# Altium PCB balan_31.PcbDoc (part 2 of 2)
Units mm, origin at the board's own origin, x right, y up, seen from the top; angles counter-clockwise.
Board outline 80 x 100 mm, 2 copper layers (Top Layer, Bottom Layer), stack 1.57 mm thick; 167 components, 120 nets, 563 pads, 148 vias.
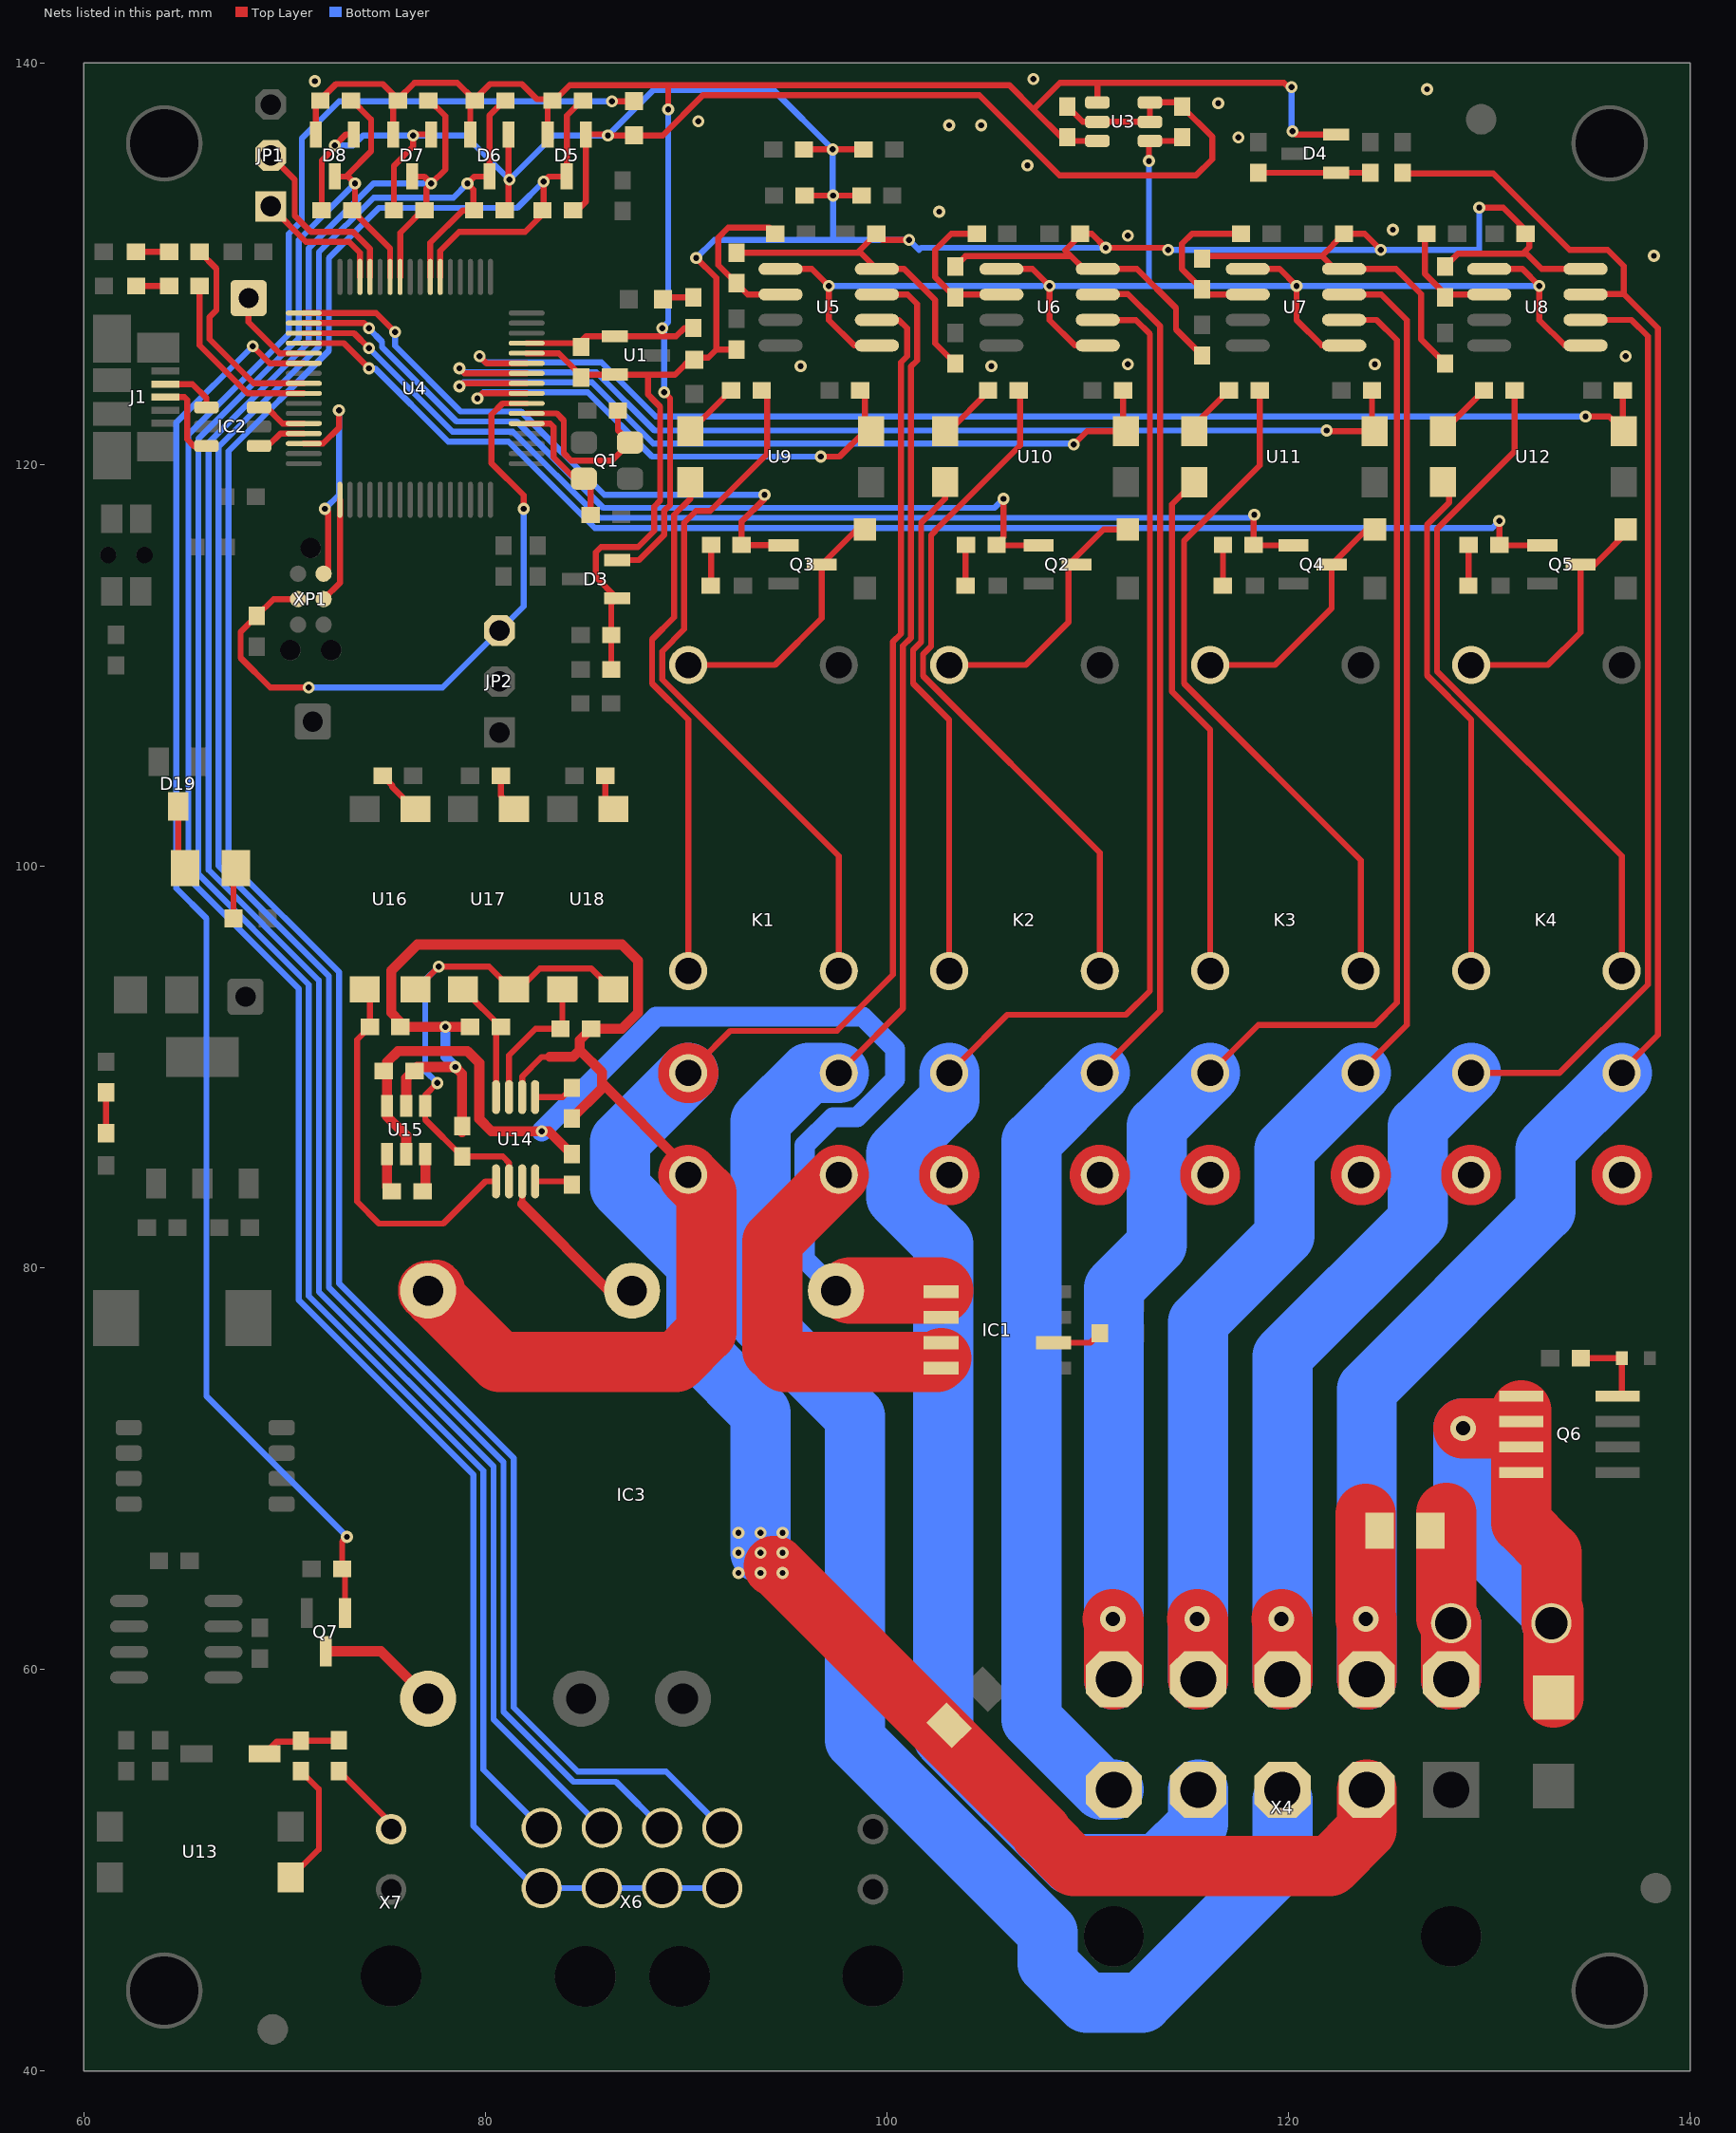
[diagram p2: the nets of this part, all layers, seen from the top]

## Via types
v1: diameter 0.6, hole 0.3, Top Layer to Bottom Layer, 143 vias
v2: diameter 1.27, hole 0.711, Top Layer to Bottom Layer, 5 vias

## Nets (pads, with @x,y where several pads share a name; then routed paths per layer and width w, separated by ;. In a path a pad name is that pad's centre, name@x,y a point inside that pad or via, vN(x,y) a via of type N, cw(c..) or ccw(c..) an arc to the next point about the centre after c; other vN are vias at no path point) (continued)
GNDA: C1.1 C3.1 C13.1 C15.1 C16.1 C17.1 C18.1 C19.1 C20.1 C21.1 C22.1 C23.1 C24.1 C25.1 C26.1 C27.1 C28.1 C29.1 C30.1 C31.1 C32.1 D3.1 D4.1 D5.1 D6.1 D7.1 D8.1 L2.1 L3.1 R10.1 R12.1 R14.1 R16.1 R18.1 R20.1 U1.2 U3.2 U3.3 U3.5 U4.12 U5.4 U6.4 U7.4 U8.4 | length 249.8
  Top Layer w0.3: C32.1@71.835,132.663 71.847,132.675 71.847,135.145 72.5,135.798 v1(72.5,135.9) 73.05,136.45 D8.1@73.447,136.45 ; C31.1@75.438,132.663 75.438,134.886 76.4,135.848 v1(76.4,136.4) 76.45,136.45 D7.1@77.297,136.45 ; C30.1@80.959,132.663 81.147,132.851 D6.1@81.147,136.45 ; U4.12@82.05,125.55 83.65,125.55 84.763,124.437 84.813,124.487 U1.2@86.45,124.487 88,124.487 ; C29.1@84.562,132.663 84.997,133.098 D5.1@84.997,136.45 86.05,136.45 v1(86.1,136.4) L3.1@87.4,136.4 88.829,136.4 90.829,138.4 104.6,138.4 108.6,134.4 115.393,134.4 116.2,135.207 116.2,136.337 C3.1@114.7,137.837 114.497,138.04 U3.3@113.1,138.04 U3.2@113.1,137.075 U3.5@110.479,137.075 109.745,137.075 C13.1@108.983,137.837 C13.1@108.983,137.864 ; R10.1@86.262,109.8 C19.1@86.262,111.513 86.262,113.062 D3.1@86.55,113.35 85.5,114.4 85.5,115.645 85.755,115.9 87.593,115.9 88.4,116.707 88.4,117.914 88.7,118.214 88.7,122.881 88.25,123.331 88.25,123.35 88.1,123.5 88.1,124.387 88,124.487 ; L2.1@90.4,125.45 89.437,124.487 88,124.487 ; v1(90.5,130.3) 91.5,129.3 91.5,125.738 ; L2.1@90.512,125.338 91.1,125.338 91.5,125.738 ; C15.1@92.5,125.738 91.5,125.738 ; C25.1@92.5,130.562 98.524,130.562 ; C23.1@95.862,135.7 v1(97.3,135.7) C24.1@98.838,135.7 ; C21.1@95.9,133.4 v1(97.319,133.4) C22.1@98.738,133.4 ; v1(101.1,131.2) 99.762,131.2 R14.1@99.462,131.5 98.524,130.562 ; C16.1@103.4,125.038 102.4,126.038 102.4,128.2 100.854,129.746 U5.4@99.5,129.746 98.684,130.562 98.524,130.562 ; C26.1@103.4,129.862 103.9,130.362 103.9,130.396 109.158,130.396 ; v1(114,130.7) 113.9,130.8 v1(110.9,130.8) 110.2,131.5 109.7,131.5 109.662,131.462 108.877,130.677 109.158,130.396 ; C17.1@115.7,125.438 114.4,126.738 114.4,127.8 112.454,129.746 U6.4@110.5,129.746 109.808,129.746 109.158,130.396 ; C27.1@115.7,130.262 115.7,130.396 121.658,130.396 ; C20.1@118.501,134.537 D4.1@122.387,134.537 R12.1@124.073,134.537 ; v1(124.6,130.7) 123.8,131.5 R18.1@122.762,131.5 121.658,130.396 ; C18.1@127.8,125.038 126.6,126.238 126.6,128.5 125.354,129.746 U7.4@122.775,129.746 122.308,129.746 121.658,130.396 ; C28.1@127.8,129.862 128.438,130.5 131.662,130.5 ; v1(129.5,132.8) 130.7,132.8 132,131.5 132,130.838 131.662,130.5 ; U8.4@134.8,129.746 132.616,129.746 131.862,130.5 131.662,130.5
  Bottom Layer w0.3: v1(72.5,135.9) 73.4,135.9 73.9,136.4 v1(76.4,136.4) 79,136.4 v1(81.2,134.2) 83.4,136.4 v1(86.1,136.4) 88.35,138.65 94.35,138.65 v1(97.3,135.7) 97.3,133.419 v1(97.319,133.4) ; v1(90.5,130.3) 91.4,131.2 97.3,131.2 ; v1@97.319,133.2 97.319,131.219 97.3,131.2 ; v1(110.9,130.8) 101.7,130.8 101.6,130.7 v1(101.1,131.2) 97.3,131.2 ; v1(114,130.7) v1(124.6,130.7) 129.5,130.7 v1(129.5,132.8)
  other v1: 95.7,124.9 105.2,124.9 112,125 124.3,125 136.8,125.4 138.2,130.4 112,131.4 125.2,131.7 102.6,132.6 107,134.9 117.5,136.3 103.1,136.9 104.7,136.9 90.6,137.1 116.5,138 126.9,138.7 71.5,139.1 107.3,139.2
GNDL: K1.21 R8.2 U5.2 X4.2 | length 116.1
  Top Layer w0.3: K1.21@90.6,89.7 90.6,90.2 92.2,91.8 97.5,91.8 100.3,94.6 100.3,111.18 100.7,111.58 100.7,125.1 101,125.4 101,126.8 100.594,127.206 U5.2@99.5,127.206
  Top Layer w2: K1.21@90.6,89.7 ccw(c90.1,89.7) K1.21@90.6,89.7
  Top Layer w3: 94.35,65.15 94.45,65.15 v1(94.8,64.8) 107.7,51.9 107.7,51.796 109.296,50.2 122.075,50.2 123.9,52.025 X4.2@123.9,54
  Bottom Layer w3: K1.21@90.1,89.7 86.7,86.3 86.7,84 90.5,80.2 90.5,75.975 93.7,72.775 v1(93.7,66.8) v1(93.7,65.8) ; v1@93.75,65.85 v1@93.8,65.8
  other v1: 92.6,64.8 93.7,64.8 92.6,65.8 94.8,65.8 92.6,66.8 94.8,66.8
GNDT: L3.2 X6.1 X6.2 X6.3 X6.4 | length 123.3
  Top Layer w0.3: v1(86.3,138.1) L3.2@87.4,138.1
  Bottom Layer w0.3: v1(86.3,138.1) 72.7,138.1 70.85,136.25 70.85,132.15 70.2,131.5 70.2,126.5 65.2,121.5 65.2,99.4 70.7,93.9 70.7,78.393 79.4,69.693 79.4,52.2 82.5,49.1 X6.4@82.8,49.1 X6.3@85.8,49.1 X6.2@88.8,49.1 X6.1@91.8,49.1
IN_ADC0: C25.2 R13.2 U5.6 | length 8.2
  Top Layer w0.3: R13.2@94.438,131.5 94.138,131.8 92.1,131.8 91.6,131.3 91.6,129.938 C25.2@92.5,129.038 93.062,128.476 U5.6@94.7,128.476
IN_ADC1: C26.2 R15.2 U6.6 | length 7.3
  Top Layer w0.3: C26.2@103.4,128.338 102.4,129.338 102.4,130.7 103.2,131.5 R15.2@104.476,131.5 ; C26.2@103.562,128.476 U6.6@105.7,128.476
IN_ADC2: C27.2 R17.2 U7.6 | length 8.2
  Top Layer w0.3: R17.2@117.638,131.5 115.2,131.5 114.7,131 114.7,129.738 C27.2@115.7,128.738 115.962,128.476 U7.6@117.975,128.476
IN_ADC3: C28.2 R19.2 U8.6 | length 5.7
  Top Layer w0.3: R19.2@127.076,131.5 126.8,131.224 126.8,129.503 127.827,128.476 U8.6@130,128.476
IN_BALANCER: R31.2 X7.2 | length 4
  Top Layer w0.3: R31.2@72.7,54.938 75.3,52.338 X7.2@75.3,52.038
IP+: C36.2 IC1.1 IC1.2 IC3.4 R43.1 U15.3 U15.5 | length 58.8
  Top Layer w0.5: U15.5@76.051,85.662 76.051,86.575 75.101,87.525 U15.3@75.101,88.062 75.101,90.253 75.649,90.8 79.1,90.8 79.695,90.205 79.695,87.405 80.3,86.8 83.162,86.8 R43.1@84.3,85.662 R43.1@84.462,85.662
  Top Layer w3: IC1.1@102.645,78.86 IC1.1@102.7,78.805
  Top Layer w3.3: IC3.4@98.16,78.86 IC1.1@102.645,78.86
  Bottom Layer w1: v1(82.8,86.8) 88.5,92.5 98.8,92.5 100.4,90.9 100.4,89.389 98.511,87.5 97.3,87.5 95.9,86.1 95.9,80.42 IC3.4@97.46,78.86
LED1: R3.1 U4.40 | length 10.5
  Top Layer w0.3: R3.1@65.762,130.6 66.6,129.762 66.6,127.7 66.25,127.35 66.25,126.25 68.45,124.05 U4.40@70.95,124.05
LED2: R4.1 U4.41 | length 9.1
  Top Layer w0.3: R4.1@65.762,128.9 65.75,128.888 65.75,125.95 68.15,123.55 U4.41@70.95,123.55
MCS: R51.1 U14.3 U18.3 | length 7.2
  Top Layer w0.3: U14.3@81.175,88.5 81.175,90.575 82.5,91.9 83.83,91.9 U18.3@83.83,93.8
MDIN: R50.1 U14.4 U17.3 | length 6.2
  Top Layer w0.3: U17.3@78.88,93.754 79.008,93.754 R50.1@80.762,92 80.525,91.763 U14.4@80.525,88.5
MSCLK: R49.1 U14.5 U16.3 | length 19.2
  Top Layer w0.3: U16.3@73.98,93.854 74.238,93.596 R49.1@74.238,92 73.6,91.362 73.6,83.3 74.7,82.2 77.9,82.2 80,84.3 U14.5@80.525,84.3
NC1_(FB1): K1.12 R27.1 | length 35.1
  Top Layer w0.3: R27.1@94.025,123.687 94.025,120.525 91.2,117.7 90.493,117.7 89.9,117.107 89.9,111.8 88.8,110.7 88.8,109.307 97.6,100.507 K1.12@97.6,94.78
NC1_(FB2): K2.12 R28.1 | length 34.6
  Top Layer w0.3: R28.1@106.625,123.687 106.625,120.958 102.4,116.733 102.4,116.687 102.2,116.487 102.2,110.958 101.8,110.558 101.8,109.482 110.6,100.682 K2.12@110.6,94.78
NC1_(FB3): K3.12 R29.1 | length 34.3
  Top Layer w0.3: R29.1@118.562,123.7 118.562,119.962 114.8,116.2 114.8,109.1 123.6,100.3 123.6,95.28 K3.12@124.1,94.78
NC1_(FB4): K4.12 R30.1 | length 34.5
  Top Layer w0.3: R30.1@131.262,123.7 131.262,120.662 127.4,116.8 127.4,109.707 136.6,100.507 136.6,95.28 K4.12@137.1,94.78
NC2_(FB1): K1.22 U9.2 | length 25.9
  Top Layer w0.3: K1.22@90.1,94.78 90.1,107.3 88.3,109.1 88.3,111.3 89.4,112.4 89.4,117.5 90.2,118.3 U9.2@90.2,119.126
NC2_(FB2): K2.22 U10.2 | length 25.8
  Top Layer w0.3: U10.2@102.9,119.13 102.9,118.307 101.7,117.107 101.7,111.166 101.3,110.766 101.3,109.1 103.1,107.3 K2.22@103.1,94.78
NC2_(FB3): K3.22 U11.2 | length 25.8
  Top Layer w0.3: U11.2@115.3,119.126 114.2,118.026 114.2,108.7 116.1,106.8 116.1,95.28 K3.22@116.6,94.78
NC2_(FB4): K4.22 U12.2 | length 25.9
  Top Layer w0.3: U12.2@128.002,119.126 128.002,118.109 126.9,117.007 126.9,109.5 129.1,107.3 129.1,95.28 K4.22@129.6,94.78
NetC6_1: C6.1 Q1.3 U4.5 | length 6.8
  Top Layer w0.3: U4.5@82.05,122.05 83.224,122.05 83.4,121.874 83.4,120.359 84.459,119.3 Q1.3@84.9,119.3 85.238,118.962 C6.1@85.238,117.5
NetC7_1: C7.1 Q1.1 U4.6 | length 9.3
  Top Layer w0.3: U4.6@82.05,122.55 83.55,122.55 83.9,122.2 83.9,120.566 84.266,120.2 86.3,120.2 Q1.1@87.2,121.1 86.6,121.7 C7.1@86.6,122.7
NetC37_1: C37.1 U15.4 | length 2
  Top Layer w0.5: U15.4@75.101,85.662 75.101,84.037 C37.1@75.338,83.8
NetC37_2: C37.2 U15.6 | length 1.9
  Top Layer w0.5: C37.2@76.862,83.8 77.001,83.939 U15.6@77.001,85.662
NetD1_A: D1.A R3.2 | length 1.6
  Top Layer w0.3: D1.A@62.594,130.6 R3.2@64.238,130.6
NetD2_A: D2.A R4.2 | length 1.6
  Top Layer w0.3: D2.A@62.6,128.9 R4.2@64.238,128.9
NetD9_A: D9.A K1.A2 Q3.3 | length 12.7
  Top Layer w0.3: K1.A2@90.6,110.02 94.42,110.02 96.748,112.348 Q3.3@96.748,115.027 98.494,116.773 D9.A@98.9,116.773
NetD10_A: D10.A K2.A2 Q2.3 | length 12.5
  Top Layer w0.3: K2.A2@103.6,110.02 106.92,110.02 109.05,112.15 109.05,115.027 110.796,116.773 D10.A@111.6,116.773
NetD11_A: D11.A R25.2 | length 2
  Top Layer w0.3: D11.A@103.92,113.964 103.92,115.982 R25.2@103.938,116
NetD12_A: D12.A R26.2 | length 2
  Top Layer w0.3: D12.A@91.238,113.981 R26.2@91.238,116
NetD13_1: D13.1 R31.1 R32.2 | length 4
  Top Layer w0.3: D13.1@69,55.8 69.6,56.4 70.751,56.4 R32.2@70.8,56.449 72.687,56.449 R31.1@72.7,56.462
NetD14_A: D14.A K3.A2 Q4.3 | length 11.8
  Top Layer w0.3: K3.A2@116.6,110.02 119.32,110.02 122.15,112.85 Q4.3@122.15,115.027 123.896,116.773 D14.A@124.3,116.773
NetD15_A: D15.A R38.2 | length 2
  Top Layer w0.3: D15.A@116.738,113.981 R38.2@116.738,116
NetD16_A: D16.A K4.A2 Q5.3 | length 12.2
  Top Layer w0.3: K4.A2@129.6,110.02 132.92,110.02 134.548,111.648 Q5.3@134.548,115.027 135.254,115.027 D16.A@137,116.773
NetD17_A: D17.A R39.2 | length 2
  Top Layer w0.3: D17.A@128.976,113.981 R39.2@128.976,116
NetD18_1: D18.1 F1.2 Q6.3 | length 29.6
  Top Layer w3: v2(128.7,72) 131.258,72 ; 131.6,72.9 Q6.3@131.6,72.342 Q6.3@131.6,71.072 Q6.3@131.6,69.802 131.6,67.3 133.1,65.8 F1.2@133.1,62.3 ; D18.1@133.2,58.6 F1.2@133.2,62.9
  Bottom Layer w3: v2(128.7,72) 128.7,67.2 133.1,62.8 F1.2@133.1,62.3
NetD19_3: D19.3 F2.1 | length 3
  Top Layer w0.3: D19.3@64.7,102.982 64.7,100.43 F2.1@65.03,100.1
NetD20_A: D20.A Q6.2 R41.1 | length 4.1
  Top Layer w0.3: R41.1@134.562,75.5 D20.A@136.6,75.5 136.6,73.812 Q6.2@136.4,73.612 ; Q6.2@137.005,73.605 Q6.2@137.1,73.7
NetD21_A: D21.A R45.1 | length 2
  Top Layer w0.3: D21.A@61.1,86.707 R45.1@61.1,88.738
NetF2_2: F2.2 L4.1 | length 2.2
  Top Layer w0.3: 67.45,97.9 67.45,99.98 F2.2@67.57,100.1
NetIC1_6: IC1.6 R5.1 | length 2.5
  Top Layer w0.3: IC1.6@108.3,76.265 110.127,76.265 R5.1@110.6,76.738
NetIC2_1: IC2.1 J1.2 | length 2.5
  Top Layer w0.3: J1.2@64.06,124.013 65.4,124.013 66.1,123.313 IC2.1@66.1,123.15
NetIC2_3: IC2.3 J1.3 | length 4.2
  Top Layer w0.3: J1.3@64.06,123.363 64.997,123.363 65.14,123.22 65.14,121.26 65.465,120.935 IC2.3@66.1,120.935
NetIC3_3: IC3.3 Q7.3 | length 6.1
  Top Layer w0.5: Q7.3@72.05,60.9 74.78,60.9 IC3.3@77.14,58.54
NetL1_1: L1.1 R1.1 | length 1.6
  Top Layer w0.3: L1.1@88.85,128.237 88.946,128.333 R1.1@90.362,128.333
NetR27_2: R27.2 U9.1 | length 3.3
  Top Layer w0.3: U9.1@89.9,121.666 U9.1@90.05,121.816 ; U9.1@90.2,121.666 90.204,121.666 R27.2@92.238,123.7 ; R27.2@92.376,123.562 R27.2@92.501,123.687
NetR28_2: R28.2 U10.1 | length 3.3
  Top Layer w0.3: U10.1@102.6,121.666 103.08,121.666 R28.2@105.101,123.687
NetR29_2: R29.2 U11.1 | length 2.7
  Top Layer w0.3: U11.1@115.5,121.666 115.5,122.162 R29.2@117.038,123.7
NetR30_2: R30.2 U12.1 | length 3.1
  Top Layer w0.3: U12.1@127.7,121.67 127.708,121.67 R30.2@129.738,123.7 ; R30.2@129.887,123.551 R30.2@130.022,123.687
NetR32_1: R32.1 U13.1 | length 6.2
  Top Layer w0.3: U13.1@70.3,49.63 71.7,51.03 71.7,54.025 R32.1@70.8,54.925
NetR43_2: R43.2 U14.8 | length 1.9
  Top Layer w0.3: U14.8@82.475,84.3 84.138,84.3 R43.2@84.3,84.138
NetR44_2: R44.2 U14.1 | length 2
  Top Layer w0.3: U14.1@82.475,88.5 83.838,88.5 R44.2@84.3,88.962
NetR46_2: R46.2 U16.1 | length 2.6
  Top Layer w0.3: R46.2@74.638,104.5 74.874,104.5 75.355,104.019 75.355,103.949 76.449,102.854 U16.1@76.52,102.854
NetR47_2: R47.2 U17.1 | length 1.9
  Top Layer w0.3: R47.2@80.762,104.5 80.762,103.512 U17.1@81.42,102.854
NetR48_2: R48.2 U18.1 | length 1.8
  Top Layer w0.3: R48.2@85.962,104.5 85.962,103.262 U18.1@86.37,102.854
NO1_(CHARGE+): IC1.3 IC1.4 K1.14 K2.14 K3.14 K4.14 | length 28.2
  Top Layer w2: K2.14@111.1,84.62 ccw(c110.6,84.62) K2.14@111.1,84.62 ; K3.14@124.1,84.62 ccw(c123.6,84.62) K3.14@124.1,84.62 ; K4.14@137.1,84.62 ccw(c136.6,84.62) K4.14@137.1,84.62
  Top Layer w3: K1.14@97.6,84.62 94.3,81.32 94.3,75.9 94.9,75.3 102.5,75.3 102.7,75.5
NO2_(CHARGE-): C36.1 C40.1 IC3.6 K1.24 K2.24 K3.24 K4.24 R44.1 R49.2 R50.2 R51.2 U14.2 U15.2 | length 90.5
  Top Layer w0.3: U14.2@81.825,88.5 81.825,89.525 82.8,90.5 83.2,90.5
  Top Layer w0.5: R49.2@75.762,92 75.762,92.238 75.3,92.7 75.3,94.8 76.6,96.1 86.8,96.1 87.606,95.294 87.606,92.706 86.8,91.9 R51.2@85.262,91.9 84.7,91.338 84.7,90.838 ; U15.2@76.051,88.062 76.051,89.451 76.6,90 v1(78.5,90) 78.838,89.662 C40.1@78.838,87.062 C40.1@78.838,86.762 ; R49.2@76.162,92 76.85,92 76.85,91.989 76.861,92 v1(78,92) R50.2@79.238,92 ; 83.2,90.5 84.362,90.5 84.7,90.838 ; R44.1@84.3,87.438 85.8,88.938 85.8,89.2 ; K1.24@90.1,84.62 K1.24@89.9,84.42 ; K1.24@90.24,84.76 K1.24@89.9,85.1 ; 84.7,90.838 85.8,89.738 85.8,89.2 ; 85.8,89.2 K1.24@89.9,85.1 ; K1.24@89.9,84.42 K1.24@89.9,85.1 ; K1.24@89.9,84.42 89.418,83.938 89.9,83.938 K1.24@89.9,84.42
  Top Layer w2: IC3.6@77.494,78.506 cw(c77.14,78.86) 76.846,78.456 cw(c77.14,78.86) 77.544,79.154 cw(c77.14,78.86) IC3.6@77.64,78.86 ; K2.24@103.6,84.62 ccw(c103.1,84.62) K2.24@103.6,84.62 ; K3.24@116.6,84.62 ccw(c116.1,84.62) K3.24@116.6,84.62 ; K4.24@129.6,84.62 ccw(c129.1,84.62) K4.24@129.6,84.62
  Top Layer w2.5: IC3.6@77.544,79.154 cw(c77.25,78.75) 77.75,78.75 cw(c77.25,78.75) IC3.6@77.604,78.396
  Top Layer w3: IC3.6@77.14,78.86 77.494,78.506 77.604,78.396 80.7,75.3 89.5,75.3 91,76.8 91,83.72 K1.24@90.1,84.62
  Bottom Layer w0.5: v1(78,92) 78,90.5 v1(78.5,90)
ON_DCDC: Q7.1 R42.1 U4.38 | length 71.3
  Top Layer w0.3: v1(68.4,125.9) 69.25,125.05 U4.38@70.95,125.05 ; Q7.1@73,62.8 73,64.862 R42.1@72.862,65 72.862,66.362 v1(73.1,66.6)
  Bottom Layer w0.3: v1(68.4,125.9) 64.6,122.1 64.6,98.9 66.1,97.4 66.1,73.6 v1(73.1,66.6)
PA11_RX: IC2.6 U4.44 | length 2.6
  Top Layer w0.3: IC2.6@68.721,122.85 69.1,122.85 69.9,122.05 U4.44@70.95,122.05
PA12_TX: IC2.4 U4.45 | length 2
  Top Layer w0.3: IC2.4@69.17,120.935 69.786,121.55 U4.45@70.95,121.55
RELAY_1: Q3.1 R26.1 U4.33 | length 32.2
  Top Layer w0.3: U4.33@70.95,127.55 74.55,127.55 v1(75.5,126.6) ; v1(93.9,118.5) 93.9,118.3 92.762,117.162 R26.1@92.762,116 94.825,116 Q3.1@94.848,115.977
  Bottom Layer w0.3: v1(75.5,126.6) 75.5,125.914 78.764,122.65 81.771,122.65 85.921,118.5 v1(93.9,118.5)
RELAY_2: Q2.1 R25.1 U4.34 | length 43.3
  Top Layer w0.3: U4.34@70.95,127.05 73.95,127.05 v1(74.2,126.8) ; v1(105.8,118.3) 105.8,116.4 105.377,115.977 Q2.1@107.15,115.977
  Bottom Layer w0.3: v1(74.2,126.8) 74.2,126.774 74.85,126.124 74.85,125.857 78.557,122.15 81.564,122.15 85.864,117.85 105.35,117.85 v1(105.8,118.3)
RELAY_3: Q4.1 R38.1 U4.35 | length 54.7
  Top Layer w0.3: U4.35@70.95,126.55 73.45,126.55 v1(74.2,125.8) ; v1(118.3,117.5) 118.262,117.462 R38.1@118.262,116 118.285,115.977 Q4.1@120.25,115.977
  Bottom Layer w0.3: v1(74.2,125.8) 78.35,121.65 81.357,121.65 85.657,117.35 116.75,117.35 118.15,117.35 v1(118.3,117.5)
RELAY_4: Q5.1 R39.1 U4.36 | length 66.9
  Top Layer w0.3: U4.36@70.95,126.05 72.95,126.05 v1(74.2,124.8) ; v1(130.5,117.2) 130.5,117.1 R39.1@130.5,116 130.523,115.977 Q5.1@132.648,115.977
  Bottom Layer w0.3: v1(74.2,124.8) 74.493,124.8 78.143,121.15 81.15,121.15 85.45,116.85 130.15,116.85 v1(130.5,117.2)
RELAY_5: U4.37 X5.1 | length 4.6
  Top Layer w0.3: X5.1@68.2,128.3 68.2,127.1 69.75,125.55 U4.37@70.95,125.55
RELAY_STATUS_1: R34.1 U4.8 U9.4 | length 26
  Top Layer w0.3: v1(79.6,123.3) 79.85,123.55 U4.8@82.05,123.55 ; v1(96.7,120.4) 97.634,120.4 98.9,121.666 98.9,123.462 R34.1@98.662,123.7
  Bottom Layer w0.3: v1(79.6,123.3) 79.9,123.6 85.1,123.6 88.3,120.4 v1(96.7,120.4)
RELAY_STATUS_2: R35.1 U4.9 U10.4 | length 40.2
  Top Layer w0.3: v1(78.7,123.9) 78.85,124.05 U4.9@82.05,124.05 ; v1(109.3,121) 109.97,121.67 U10.4@111.5,121.67 ; U10.4@111.6,121.666 U10.4@111.6,121.949 ; R35.1@111.762,123.7 111.762,121.808 U10.4@111.9,121.67
  Bottom Layer w0.3: v1(78.7,123.9) 78.9,124.1 85.307,124.1 88.357,121.05 109.25,121.05 v1(109.3,121)
RELAY_STATUS_3: R36.1 U4.10 U11.4 | length 52.4
  Top Layer w0.3: v1(78.7,124.8) 78.95,124.55 U4.10@82.05,124.55 ; v1(121.9,121.7) 121.934,121.666 U11.4@124.3,121.666 124.162,121.804 R36.1@124.162,123.7
  Bottom Layer w0.3: v1(78.7,124.8) 78.9,124.6 85.514,124.6 88.414,121.7 v1(121.9,121.7)
RELAY_STATUS_4: R37.1 U4.11 U12.4 | length 63.8
  Top Layer w0.3: v1(79.7,125.4) 80.05,125.05 U4.11@82.05,125.05 ; v1(134.8,122.4) 135.97,122.4 U12.4@136.662,121.708 ; R37.1@136.662,123.7 U12.4@136.662,121.708 ; U12.4@137.002,121.666 136.7,121.968 U12.4@136.7,121.67 U12.4@136.662,121.708
  Bottom Layer w0.3: v1(79.7,125.4) 80,125.1 85.774,125.1 88.474,122.4 v1(134.8,122.4)
SWCLK: U4.49 XP1.4 | length 5.3
  Top Layer w0.3: XP1.4@71.935,113.3 72.75,114.115 U4.49@72.75,118.25
SWD-RST: C10.2 JP2.3 U4.7 XP1.3 | length 33.4
  Top Layer w0.3: XP1.3@70.665,113.3 69.438,113.3 C10.2@68.6,112.462 67.8,111.662 67.8,110.379 69.279,108.9 v1(71.2,108.9) ; v1(81.9,117.8) 81.9,118.471 80.3,120.071 80.3,122.5 80.85,123.05 U4.7@82.05,123.05
  Bottom Layer w0.3: v1(71.2,108.9) 77.86,108.9 JP2.3@80.7,111.74 81.9,112.94 v1(81.9,117.8)
SWDIO: U4.46 XP1.2 | length 11.5
  Top Layer w0.3: U4.46@70.95,121.05 71.907,121.05 72.7,121.843 v1(72.7,122.7) ; XP1.2@71.935,114.57 72.158,114.793 72.158,117.642 v1(72,117.8)
  Bottom Layer w0.3: v1(72,117.8) 72.7,118.5 v1(72.7,122.7)
T_SENS1+: C29.2 D5.3 R21.1 U4.22 X6.5 | length 119.7
  Top Layer w0.3: U4.22@77.75,129.35 77.75,130.657 78.693,131.6 81.975,131.6 83.038,132.663 82.9,132.801 v1(82.9,134.1) 83.15,134.35 D5.3@84.047,134.35 84.047,137.388 R21.1@84.859,138.2
  Bottom Layer w0.3: v1(82.9,134.1) 81.586,132.786 74.7,132.786 72.2,130.286 72.2,125.672 67.2,120.672 67.2,100.228 72.7,94.728 72.7,79.221 81.4,70.521 81.4,58.1 84.6,54.9 89,54.9 X6.5@91.8,52.1
T_SENS2+: C30.2 D6.3 R22.1 U4.23 X6.6 | length 111.2
  Top Layer w0.3: U4.23@77.25,129.35 77.25,131.05 78.863,132.663 C30.2@79.435,132.663 79.4,132.698 79.4,133.7 v1(79.1,134) 79.45,134.35 D6.3@80.197,134.35 80.197,137.4 R22.1@80.997,138.2
  Bottom Layer w0.3: v1(79.1,134) 78.4,133.3 74.426,133.3 71.7,130.574 71.7,125.879 66.7,120.879 66.7,100.021 72.2,94.521 72.2,79.014 80.9,70.314 80.9,57.893 84.393,54.4 86.5,54.4 X6.6@88.8,52.1
T_SENS3+: C31.2 D7.3 R23.1 U4.26 X6.7 | length 107.5
  Top Layer w0.3: U4.26@75.75,129.35 75.75,131.55 77.059,132.859 77.059,133.759 v1(77.3,134) ; D7.3@76.347,134.35 76.95,134.35 v1(77.3,134) ; R23.1@77.159,138.2 78,137.359 78,134.7 v1(77.3,134)
  Bottom Layer w0.3: v1(77.3,134) 74.419,134 71.2,130.781 71.2,126.086 66.2,121.086 66.2,99.814 71.7,94.314 71.7,78.807 80.4,70.107 80.4,57.5 X6.7@85.8,52.1
T_SENS4+: C32.2 D8.3 R24.1 U4.27 X6.8 | length 103.6
  Top Layer w0.3: D8.3@72.497,134.35 73.15,134.35 ; R24.1@73.297,138.2 74.3,137.197 74.3,135.6 73.15,134.45 73.15,134.35 ; U4.27@75.25,129.35 75.25,130.773 C32.2@73.359,132.663 73.5,132.804 v1(73.5,134) 73.15,134.35
  Bottom Layer w0.3: v1(73.5,134) 70.7,131.2 70.7,126.293 65.7,121.293 65.7,99.607 71.2,94.107 71.2,78.6 79.9,69.9 79.9,55 X6.8@82.8,52.1
TRACE_RX: JP1.1 U4.30 | length 6.6
  Top Layer w0.3: JP1.1@69.3,132.86 71.06,131.1 73.2,131.1 73.75,130.55 U4.30@73.75,129.35
TRACE_TX: JP1.2 U4.29 | length 9.3
  Top Layer w0.3: JP1.2@69.3,135.4 70.5,134.2 70.5,132.4 71.3,131.6 73.407,131.6 74.25,130.757 U4.29@74.25,129.35
TRIM: IC3.5 U14.7 | length 8.4
  Top Layer w0.3: 81.825,83.175 U14.7@81.825,84.3
  Top Layer w0.5: 81.825,83.175 86.14,78.86 IC3.5@87.3,78.86
V_BAT_12V: F1.1 R7.2 X4.6 | length 11.2
  Top Layer w3: 127.85,67.8 127.85,62.55 F1.1@128.1,62.3 X4.6@128.1,59.5
  Bottom Layer w3: X4.6@128.1,59.5 F1.1@128.1,62.3
VB1H: K1.11 U5.3 X4.3 | length 113.2
  Top Layer w0.3: K1.11@98.1,89.7 98.1,90.205 100.8,92.905 100.8,110.973 101.2,111.373 101.2,124.893 101.5,125.193 101.5,128 101.024,128.476 U5.3@99.5,128.476
  Bottom Layer w3: K1.11@97.6,89.7 96.1,89.7 93.7,87.3 93.7,77.3 98.4,72.6 98.4,56.5 108,46.9 108,45.333 109.933,43.4 112.7,43.4 119.7,50.4 X4.3@119.7,53.5
VB2H: K2.11 U6.3 X4.5 | length 81.2
  Top Layer w0.3: U6.3@110.5,128.476 110.524,128.5 112,128.5 113.6,126.9 113.6,92.8 111.1,90.3 K2.11@111.1,89.7
  Bottom Layer w3: K2.11@110.6,89.7 107.2,86.3 107.2,57.5 110.7,54 X4.5@111.3,54
VB2L: K2.21 U6.2 X4.4 | length 100.1
  Top Layer w0.3: K2.21@103.6,89.7 103.6,90.2 106,92.6 111.9,92.6 113.1,93.8 113.1,126.5 112.4,127.2 110.506,127.2 U6.2@110.5,127.206
  Bottom Layer w3: K2.21@103.1,89.7 103.1,88.368 100.45,85.718 100.45,83.522 102.786,81.186 102.8,81.2 102.8,56.625 109.125,50.3 113.5,50.3 115.5,52.3 X4.4@115.5,54
VB3H: K3.11 U7.3 X4.9 | length 78.5
  Top Layer w0.3: U7.3@122.775,128.476 124.624,128.476 125.9,127.2 125.9,92.1 124.1,90.3 K3.11@124.1,89.7
  Top Layer w3: v2(115.45,62.5) 115.5,62.45 X4.9@115.5,59.5
  Bottom Layer w3: X4.9@115.5,59.5 115.5,77.3 119.8,81.6 119.8,85.9 K3.11@123.6,89.7
VB3L: K3.21 U7.2 X4.10 | length 81.8
  Top Layer w0.3: K3.21@116.6,89.7 116.6,90.2 118.5,92.1 124.3,92.1 125.4,93.2 125.4,94.8 125.4,126.2 124.394,127.206 U7.2@122.775,127.206
  Top Layer w3: v2(111.25,62.5) 111.3,62.45 X4.10@111.3,59.5
  Bottom Layer w3: X4.10@111.3,59.5 111.3,79 113.45,81.15 113.45,87.05 K3.21@116.1,89.7
VB4H: K4.11 R7.1 R11.2 U8.3 X4.7 | length 100
  Top Layer w0.3: R11.2@125.687,134.538 125.725,134.5 130.2,134.5 134,130.7 135.9,130.7 136.7,129.9 136.7,128.5 ; U8.3@134.8,128.476 134.824,128.5 136.7,128.5 ; K4.11@137.1,89.7 137.1,90.3 138.4,91.6 138.4,126.8 136.7,128.5
  Top Layer w3: v2(123.85,62.5) R7.1@123.85,67.75 ; X4.7@123.9,59.5 v2@123.9,62.5
  Bottom Layer w3: X4.7@123.9,59.5 123.9,73.93 132.8,82.83 132.8,85.9 K4.11@136.6,89.7
VB4L: K4.21 U8.2 X4.8 | length 83
  Top Layer w0.3: K4.21@129.6,89.7 133.5,89.7 137.9,94.1 137.9,126.4 137.094,127.206 U8.2@134.8,127.206
  Top Layer w3: v2(119.65,62.5) 119.7,62.45 X4.8@119.7,59.5
  Bottom Layer w3: X4.8@119.7,59.5 119.7,75.6 126.45,82.35 126.45,87.05 K4.21@129.1,89.7
VCCA: C1.2 C13.2 D3.2 D4.2 D5.2 D6.2 D7.2 D8.2 R1.2 R21.2 R22.2 R23.2 R24.2 U1.1 U3.4 U3.6 U4.13 | length 103.7
  Top Layer w0.3: D8.2@71.547,136.45 71.547,137.974 71.773,138.2 71.8,138.2 72.556,138.956 74.879,138.956 R23.2@75.635,138.2 ; D7.2@75.397,136.45 75.397,137.962 R23.2@75.635,138.2 ; D6.2@79.247,136.45 79.247,137.974 R22.2@79.473,138.2 ; U4.13@82.05,126.05 84.674,126.05 85.011,126.387 U1.1@86.45,126.387 88.7,126.387 ; D5.2@83.097,136.45 83.097,137.962 83.335,138.2 82.561,138.2 81.804,138.956 80.23,138.956 R22.2@79.473,138.2 ; R21.2@83.335,138.137 83.437,138.137 84.2,138.9 89.1,138.9 ; D3.2@86.55,115.25 87.65,115.25 88.9,116.5 88.9,117.707 89.2,118.007 89.2,123.3 v1(88.9,123.6) ; v1(88.8,126.8) 88.8,126.487 88.7,126.387 ; v1(89.1,137.7) 89.1,138.9 ; R1.2@90.362,126.809 89.909,126.809 89.487,126.387 88.7,126.387 ; C13.2@108.762,136.238 107.3,137.7 ; C13.2@108.762,136.413 C13.2@108.983,136.413 ; C13.2@108.983,136.313 109.171,136.125 U3.6@110.479,136.125 U3.6@110.85,136.125 ; 110.475,139.02 108.62,139.02 107.3,137.7 ; U3.4@110.479,138.04 110.479,139.02 119.78,139.02 120,138.8 v1(120.15,138.8) ; v1(120.2,136.6) 120.363,136.437 D4.2@122.387,136.437 ; R23.2@75.635,138.2 76.458,139.023 78.6,139.023 79.423,138.2 R22.2@79.473,138.2 ; 89.1,138.9 106.1,138.9 107.3,137.7
  Bottom Layer w0.3: v1(88.9,123.6) 88.9,126.7 v1(88.8,126.8) 89.1,127.1 v1(89.1,137.7) ; v1(120.15,138.8) 120.15,136.85 120.3,136.7 v1(120.2,136.6)
VPOT: C40.2 U14.6 U15.1 U16.4 U17.4 U18.4 | length 26.2
  Top Layer w0.3: U16.4@76.52,93.854 v1(77.666,95) 80.174,95 81.42,93.754 81.554,93.754 82.7,94.9 85.27,94.9 U18.4@86.37,93.8 ; v1(77.6,89.2) 77.001,88.601 U15.1@77.001,88.062 77.001,87.375 C40.2@78.838,85.538 80.862,85.538 81.175,85.225 U14.6@81.175,84.3
  Bottom Layer w0.3: v1(77.6,89.2) 77,89.8 77,94.334 v1(77.666,95)
VREF: C3.2 U3.1 U5.1 U5.5 U6.1 U6.5 U7.1 U7.5 U8.1 U8.5 | length 73.4
  Top Layer w0.3: U5.5@94.7,129.746 96.254,129.746 v1(97.1,128.9) 97.1,127.205 98.369,125.936 U5.1@99.5,125.936 ; U6.5@105.7,129.746 107.254,129.746 v1(108.1,128.9) 108.1,127.2 109.364,125.936 U6.1@110.5,125.936 ; v1(113.05,135.125) U3.1@113.05,135.9 ; U3.1@113.05,136.075 U3.1@113.1,136.125 ; U3.1@113.1,136.225 U3.1@113.1,136.125 ; C3.2@114.7,136.313 114.512,136.125 U3.1@113.1,136.125 ; U7.5@117.975,129.746 119.554,129.746 v1(120.4,128.9) 120.4,127.205 121.669,125.936 U7.1@122.775,125.936 ; U8.5@130,129.746 131.654,129.746 v1(132.5,128.9) 132.5,127.2 133.764,125.936 U8.1@134.8,125.936
  Bottom Layer w0.3: v1(97.1,128.9) 107.7,128.9 ; v1(108.1,128.9) 113.1,128.9 ; v1(113.05,135.125) 113.05,128.95 113.1,128.9 ; v1(132.5,128.9) v1(120.4,128.9) 113.1,128.9
pads on no net: J1.4 SW1.0 T1.TP T2.TP T3.TP U1.3 U2.5 U2.8 U4.2 U4.3 U4.4 U4.25 U4.28 U4.42 U4.43 U4.50 U4.54 U5.8 U6.8 U7.8 U8.8 X2.0 X4.0 X6.0 X7.0 XP1.0 XP1.6

## Polygon pours and split planes (outlines as drawn)
GND on Top Layer "GNDL_T" (solid, pour order 8): 60,140 140,140 140,40 60,40
GNDA on Top Layer "GNDA_T" (solid, pour order 4): 70.9,140 70.9,131.8 81.2,131.8 84.2,128.8 84.2,123.8 139.1,123.8 139.1,132.3 135.4,132.3 127.6,140.1
NO2_(CHARGE-) on Top Layer "CH-" (solid, pour order 2): 131.7,84.5 131.7,86.9 129.1,89.3 94,89.3 91.4,87.1 88.9,87.1 88,88 87.9,96.3 72.7,96.3 72.7,81 80,73.8 89.6,74.4 90.8,80.4 93.2,82.2 96,84.6
NO1_(CHARGE+) on Top Layer "CH+" (solid, pour order 0): 97.6,84.62 138.1,84.5 138.1,81.3 136.5,80 105.4,80 104.1,74.7 94.55,74.55 94.28,81.3
GND on Bottom Layer "GNDL_B" (solid, pour order 10): 140,40 60,40 60,140 140,140
GNDA on Bottom Layer "GNDA_B" (solid, pour order 6): 70.9,140 70.9,131.8 81.2,131.8 84.2,128.8 84.2,123.8 139.1,123.8 139.1,132.3 135.4,132.3 127.6,140.1

## Keep-outs
Keep-Out Layer:
  the board outline again, w0.1

## Other copper
Top Layer:
  region net GND: 102.758,59.569 105.432,56.848 106.742,58.136 104.068,60.857
  rectangle net NO1_(CHARGE+): 101.1,74.9 104,76.9
  region net NO2_(CHARGE-): 74.758,78.97 77.092,76.637 79.425,78.97 77.092,81.303
  rectangle net GND: 83.1,56.9 86.4,60.2
  rectangle net DMOUT: 77.3,104.1 78.2,104.9
  pour cut-out: 140,40 140,47.9 136,47.9 132.1,44 132.088,44 132.088,40.012 132.1,40
  pour cut-out: 60,40 67.9,40 67.9,44 64,47.9 64,47.912 60.012,47.912 60,47.9
  pour cut-out: 60,140 60,132.1 64,132.1 67.9,136 67.912,136 67.912,139.988 67.9,140
  pour cut-out: 140,140 132.1,140 132.1,136 136,132.1 136,132.088 139.988,132.088 140,132.1
  region net GNDL: 95.2,67.7 ccw(c156.622,128.722) 95.6,67.3 ccw(c689.024,65.8) 95.6,64.3 ccw(c171.854,-12.356) 95.2,63.9 ccw(c93.7,-278.871) 92.2,63.9 ccw(c0.152,-27.747) 91.8,64.3 ccw(c-488.057,65.8) 91.8,67.3 ccw(c30.638,128.86) 92.2,67.7 ccw(c93.7,411.966)
  region net V_BAT_12V: 129.6,61.4 ccw(c191.022,122.421) 130,61 ccw(c723.424,59.5) 130,58 ccw(c206.254,-18.656) 129.6,57.6 ccw(c128.1,-285.172) 126.6,57.6 ccw(c34.552,-34.048) 126.2,58 ccw(c-453.657,59.5) 126.2,61 ccw(c65.038,122.559) 126.6,61.4 ccw(c128.1,405.666)
  region net GNDL: 125.4,55.9 ccw(c186.822,116.921) 125.8,55.5 ccw(c719.224,54) 125.8,52.5 ccw(c202.054,-24.156) 125.4,52.1 ccw(c123.9,-290.672) 122.4,52.1 ccw(c30.352,-39.548) 122,52.5 ccw(c-457.857,54) 122,55.5 ccw(c60.838,117.059) 122.4,55.9 ccw(c123.9,400.166)
  region net GND: 129.6,55.9 ccw(c191.022,116.921) 130,55.5 ccw(c723.424,54) 130,52.5 ccw(c206.254,-24.156) 129.6,52.1 ccw(c128.1,-290.672) 126.6,52.1 ccw(c34.552,-39.548) 126.2,52.5 ccw(c-453.657,54) 126.2,55.5 ccw(c65.038,117.059) 126.6,55.9 ccw(c128.1,400.166)
  region net VB2H: 112.8,55.9 ccw(c174.222,116.921) 113.2,55.5 ccw(c706.624,54) 113.2,52.5 ccw(c189.454,-24.156) 112.8,52.1 ccw(c111.3,-290.672) 109.8,52.1 ccw(c17.752,-39.548) 109.4,52.5 ccw(c-470.457,54) 109.4,55.5 ccw(c48.238,117.059) 109.8,55.9 ccw(c111.3,400.166)
  region net VB2L: 117,55.9 ccw(c178.422,116.921) 117.4,55.5 ccw(c710.824,54) 117.4,52.5 ccw(c193.654,-24.156) 117,52.1 ccw(c115.5,-290.672) 114,52.1 ccw(c21.952,-39.548) 113.6,52.5 ccw(c-466.257,54) 113.6,55.5 ccw(c52.438,117.059) 114,55.9 ccw(c115.5,400.166)
  region net VB1H: 121.2,55.9 ccw(c182.622,116.921) 121.6,55.5 ccw(c715.024,54) 121.6,52.5 ccw(c197.854,-24.156) 121.2,52.1 ccw(c119.7,-290.672) 118.2,52.1 ccw(c26.152,-39.548) 117.8,52.5 ccw(c-462.057,54) 117.8,55.5 ccw(c56.638,117.059) 118.2,55.9 ccw(c119.7,400.166)
  region net VB4H: 125.4,61.4 ccw(c186.822,122.421) 125.8,61 ccw(c719.224,59.5) 125.8,58 ccw(c202.054,-18.656) 125.4,57.6 ccw(c123.9,-285.172) 122.4,57.6 ccw(c30.352,-34.048) 122,58 ccw(c-457.857,59.5) 122,61 ccw(c60.838,122.559) 122.4,61.4 ccw(c123.9,405.666)
  region net VB4L: 121.2,61.4 ccw(c182.622,122.421) 121.6,61 ccw(c715.024,59.5) 121.6,58 ccw(c197.854,-18.656) 121.2,57.6 ccw(c119.7,-285.172) 118.2,57.6 ccw(c26.152,-34.048) 117.8,58 ccw(c-462.057,59.5) 117.8,61 ccw(c56.638,122.559) 118.2,61.4 ccw(c119.7,405.666)
  region net VB3L: 112.8,61.4 ccw(c174.222,122.421) 113.2,61 ccw(c706.624,59.5) 113.2,58 ccw(c189.454,-18.656) 112.8,57.6 ccw(c111.3,-285.172) 109.8,57.6 ccw(c17.752,-34.048) 109.4,58 ccw(c-470.457,59.5) 109.4,61 ccw(c48.238,122.559) 109.8,61.4 ccw(c111.3,405.666)
  region net VB3H: 117,61.4 ccw(c178.422,122.421) 117.4,61 ccw(c710.824,59.5) 117.4,58 ccw(c193.654,-18.656) 117,57.6 ccw(c115.5,-285.172) 114,57.6 ccw(c21.952,-34.048) 113.6,58 ccw(c-466.257,59.5) 113.6,61 ccw(c52.438,122.559) 114,61.4 ccw(c115.5,405.666)
Bottom Layer:
  region net GND: 82.467,58.533 84.8,56.2 87.133,58.533 84.8,60.867
  pour cut-out: 140,40 140,47.9 136,47.9 132.1,44 132.088,44 132.088,40.012 132.1,40
  pour cut-out: 60,40 67.9,40 67.9,44 64,47.9 64,47.912 60.012,47.912 60,47.9
  pour cut-out: 60,140 60,132.1 64,132.1 67.9,136 67.912,136 67.912,139.988 67.9,140
  pour cut-out: 140,140 132.1,140 132.1,136 136,132.1 136,132.088 139.988,132.088 140,132.1
  region net GNDL: 95.2,67.7 ccw(c156.622,128.722) 95.6,67.3 ccw(c689.024,65.8) 95.6,64.3 ccw(c171.854,-12.356) 95.2,63.9 ccw(c93.7,-278.871) 92.2,63.9 ccw(c0.152,-27.747) 91.8,64.3 ccw(c-488.057,65.8) 91.8,67.3 ccw(c30.638,128.86) 92.2,67.7 ccw(c93.7,411.966)
  region net VB2H: 108.7,61.4 ccw(c170.122,122.422) 109.1,61 ccw(c702.524,59.5) 109.1,58 ccw(c185.354,-18.656) 108.7,57.6 ccw(c107.2,-285.171) 105.7,57.6 ccw(c13.651,-34.047) 105.3,58 ccw(c-474.557,59.5) 105.3,61 ccw(c44.138,122.56) 105.7,61.4 ccw(c107.2,405.666)
  region net VB3L: 112.8,61.4 ccw(c174.222,122.421) 113.2,61 ccw(c706.624,59.5) 113.2,58 ccw(c189.454,-18.656) 112.8,57.6 ccw(c111.3,-285.172) 109.8,57.6 ccw(c17.752,-34.048) 109.4,58 ccw(c-470.457,59.5) 109.4,61 ccw(c48.238,122.559) 109.8,61.4 ccw(c111.3,405.666)
  region net VB3H: 117,61.4 ccw(c178.422,122.421) 117.4,61 ccw(c710.824,59.5) 117.4,58 ccw(c193.654,-18.656) 117,57.6 ccw(c115.5,-285.172) 114,57.6 ccw(c21.952,-34.048) 113.6,58 ccw(c-466.257,59.5) 113.6,61 ccw(c52.438,122.559) 114,61.4 ccw(c115.5,405.666)
  region net VB4L: 121.2,61.4 ccw(c182.622,122.421) 121.6,61 ccw(c715.024,59.5) 121.6,58 ccw(c197.854,-18.656) 121.2,57.6 ccw(c119.7,-285.172) 118.2,57.6 ccw(c26.152,-34.048) 117.8,58 ccw(c-462.057,59.5) 117.8,61 ccw(c56.638,122.559) 118.2,61.4 ccw(c119.7,405.666)
  region net VB4H: 125.4,61.4 ccw(c186.822,122.421) 125.8,61 ccw(c719.224,59.5) 125.8,58 ccw(c202.054,-18.656) 125.4,57.6 ccw(c123.9,-285.172) 122.4,57.6 ccw(c30.352,-34.048) 122,58 ccw(c-457.857,59.5) 122,61 ccw(c60.838,122.559) 122.4,61.4 ccw(c123.9,405.666)
  region net V_BAT_12V: 129.6,61.4 ccw(c191.022,122.421) 130,61 ccw(c723.424,59.5) 130,58 ccw(c206.254,-18.656) 129.6,57.6 ccw(c128.1,-285.172) 126.6,57.6 ccw(c34.552,-34.048) 126.2,58 ccw(c-453.657,59.5) 126.2,61 ccw(c65.038,122.559) 126.6,61.4 ccw(c128.1,405.666)
  region net GND: 129.6,55.9 ccw(c191.022,116.921) 130,55.5 ccw(c723.424,54) 130,52.5 ccw(c206.254,-24.156) 129.6,52.1 ccw(c128.1,-290.672) 126.6,52.1 ccw(c34.552,-39.548) 126.2,52.5 ccw(c-453.657,54) 126.2,55.5 ccw(c65.038,117.059) 126.6,55.9 ccw(c128.1,400.166)
  region net GNDL: 125.4,55.9 ccw(c186.822,116.921) 125.8,55.5 ccw(c719.224,54) 125.8,52.5 ccw(c202.054,-24.156) 125.4,52.1 ccw(c123.9,-290.672) 122.4,52.1 ccw(c30.352,-39.548) 122,52.5 ccw(c-457.857,54) 122,55.5 ccw(c60.838,117.059) 122.4,55.9 ccw(c123.9,400.166)
  region net VB1H: 121.2,55.9 ccw(c182.622,116.921) 121.6,55.5 ccw(c715.024,54) 121.6,52.5 ccw(c197.854,-24.156) 121.2,52.1 ccw(c119.7,-290.672) 118.2,52.1 ccw(c26.152,-39.548) 117.8,52.5 ccw(c-462.057,54) 117.8,55.5 ccw(c56.638,117.059) 118.2,55.9 ccw(c119.7,400.166)
  region net VB2L: 117,55.9 ccw(c178.422,116.921) 117.4,55.5 ccw(c710.824,54) 117.4,52.5 ccw(c193.654,-24.156) 117,52.1 ccw(c115.5,-290.672) 114,52.1 ccw(c21.952,-39.548) 113.6,52.5 ccw(c-466.257,54) 113.6,55.5 ccw(c52.438,117.059) 114,55.9 ccw(c115.5,400.166)
  region net VB2H: 112.8,55.9 ccw(c174.222,116.922) 113.2,55.5 ccw(c706.624,54) 113.2,52.5 ccw(c189.454,-24.156) 112.8,52.1 ccw(c111.3,-290.671) 109.8,52.1 ccw(c17.751,-39.547) 109.4,52.5 ccw(c-470.457,54) 109.4,55.5 ccw(c48.238,117.06) 109.8,55.9 ccw(c111.3,400.166)

## Silkscreen, mask and mechanical layers (free items; w line width, h text height)
Top Overlay:
  text "RL5" at 69.9,128.2 h0.6
  text "GND" at 72,109 h0.6
  text "VDD" at 70.6,92.7 h0.6 r90
  text "BALANCE REV_C_1.1" at 103,68.2 h1.2
  text "CL3" at 110.6,64.6 h0.6
  text "CH3" at 114.7,64.6 h0.6
  text "CL4" at 119,64.6 h0.6
  text "CH4" at 123.1,64.6 h0.6
  text "12V" at 127.3,64.6 h0.6
  text "CH2" at 109.7,56.5 h0.6
  text "CL2" at 113.8,56.5 h0.6
  text "CH1" at 118.1,56.5 h0.6
  text "CL1" at 122.4,56.5 h0.6
  text "GND" at 126.4,56.5 h0.6
  text "TS4" at 82.2,54.4 h0.6
  text "TS3" at 85.2,54.4 h0.6
  text "TS2" at 88.2,54.4 h0.6
  text "TS1" at 91.2,54.4 h0.6
  text "BAL" at 76.7,52.1 h0.6
  text "CNH" at 100.9,51.9 h0.6
  text "GND" at 76.7,50.8 h0.6
  text "CNL" at 100.9,50.6 h0.6
Mechanical 1:
  lines w0.02: 60,40 60,140 ; 85,40 140,40 140,140 85,140
Mechanical 13:
  circle w0.1: c136,44 r1.7

## Dimensions
140,40 to 136,44 on Mechanical 13
140,40 to 140,140 on Mechanical 13
60,40 to 140,40 on Mechanical 13
136,44 to 145.75,36.5 on Mechanical 13
136,136 to 136,44 on Mechanical 13
64,44 to 136,44 on Mechanical 13
64,44 to 60,40 on Mechanical 13

## Text inside footprints (layer, text, board x,y; h text height)
J1: Mechanical 1 "Front face" at 59.085,122.687 h0.25 r90; Mechanical 1 "PCB edge" at 59.835,122.712 h0.25 r90
T1: Mechanical 3 ">LABEL" at 71.051,43.464 h1.57 r90
T2: Mechanical 3 ">LABEL" at 139.951,50.497 h1.57 r90
T3: Mechanical 3 ">LABEL" at 131.251,138.597 h1.57 r90